# EAGLE board 555osc (EAGLE 7.3.0)
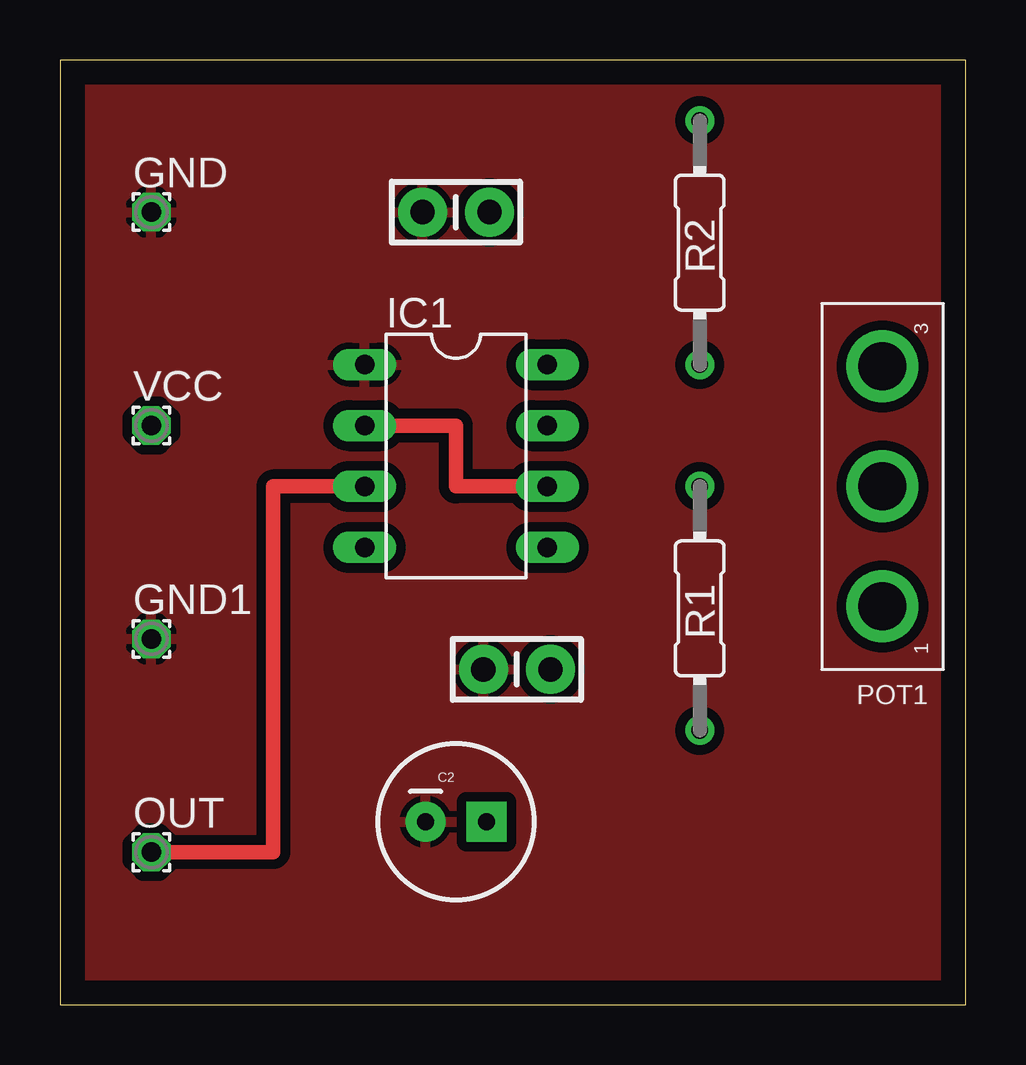
[diagram p0: board, top side]
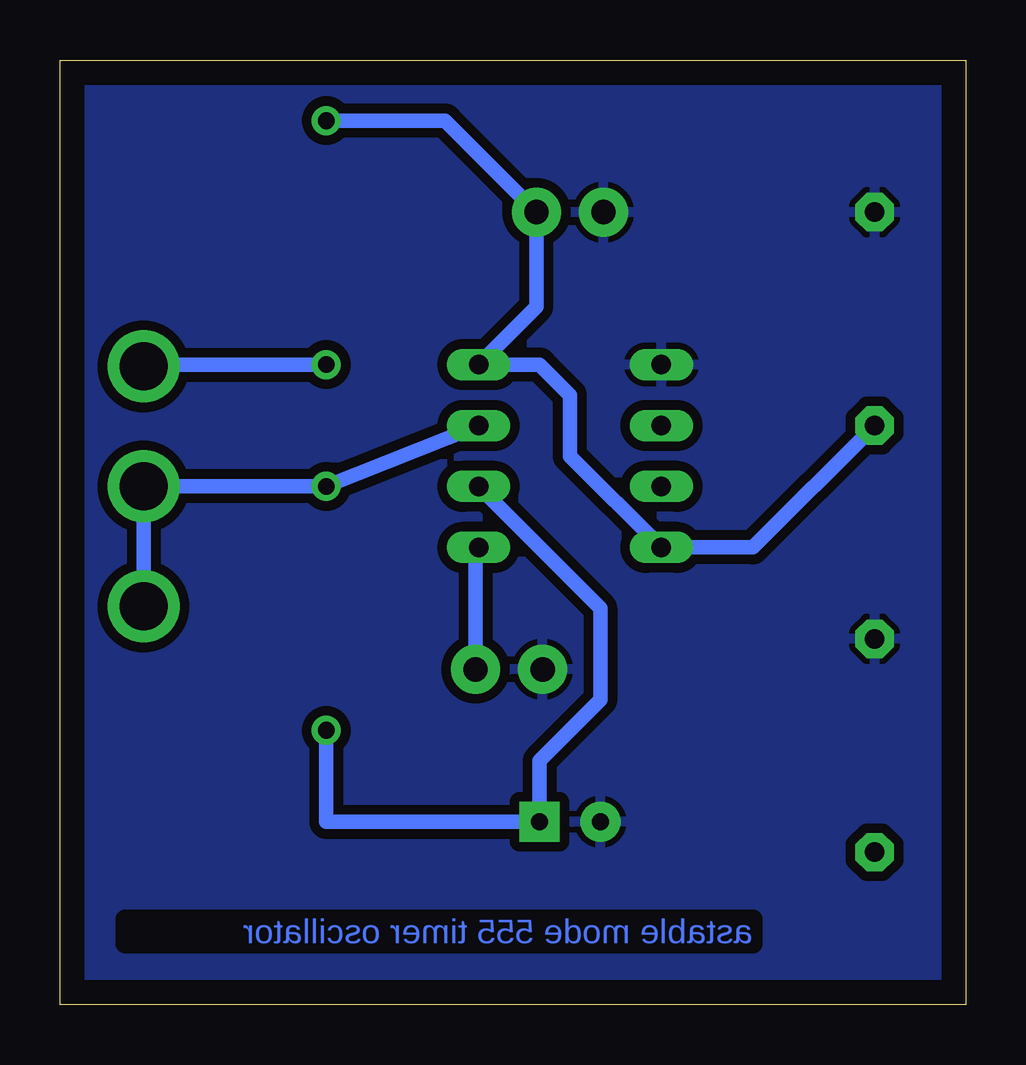
[diagram p1: board, bottom side, seen from below]

Size 37.77 x 39.36 mm. Coordinates in mm from the lower left corner, seen from the top.
Outline: 0,0 37.77,0 37.77,39.36 0,39.36 0,0
Copper layers (1*16): Top 0.035mm / dielectric 1.5mm / Bottom 0.035mm
Design rules "default": minimum track width 10mil, minimum drill 24mil, track to track 8mil, track to pad 8mil, pad to pad 8mil, via to via 8mil, smd to smd 8mil, copper to edge 40mil, drill to drill 8mil, minimum pad ring 10mil, minimum via ring 8mil, stop-mask expansion 4mil, vias tented up to drill 0mil, thermal gap 10mil

## Footprints (pad centres in the part's own frame; a part is rotated, then mirrored left to right if it is on the bottom)
CAP-PTH-SMALL-KIT = drill 1.016 pad 2.032: 1 -1.397,0; 2 1.397,0
CPOL-RADIAL-100UF-25V = drill 0.7 pad 1.651 square: 1 1.27,0 | drill 0.7 pad 1.651: 2 -1.27,0
1,6/0,8 = drill 0.813 pad 1.6 octagon: 1 0,0
DIL08 = drill 0.813 long: 1 -3.81,-3.81; 2 -1.27,-3.81; 3 1.27,-3.81; 4 3.81,-3.81; 5 3.81,3.81; 6 1.27,3.81; 7 -1.27,3.81; 8 -3.81,3.81
POT = drill 2: 1 -5,0; 2 0,0; 3 5,0
RESISTOR = drill 0.7: 1 -5.08,0; 2 5.08,0

## Placement (x,y rotation side)
C1  [CAP-PTH-SMALL-KIT]  19.05,13.97 180 top
C2  [CPOL-RADIAL-100UF-25V]  16.51,7.62 0 top
C3  [CAP-PTH-SMALL-KIT]  16.51,33.02 180 top
GND  [1,6/0,8]  3.81,33.02 0 top
GND1  [1,6/0,8]  3.81,15.24 0 top
IC1  ICM7555  [DIL08]  16.51,22.86 270 top
OUT  [1,6/0,8]  3.81,6.35 0 top
POT1  [POT]  34.29,21.59 90 top
R1  3MM.3  [RESISTOR]  26.67,16.51 90 top
R2  3MM.3  [RESISTOR]  26.67,31.75 90 top
VCC  [1,6/0,8]  3.81,24.13 0 top

## Library data of the parts
C1 C3 = SparkFun-Capacitors; PROD_ID: CAP-08370
C2 = SparkFun-Passives
GND GND1 OUT VCC = wirepad
IC1 = maxim; MF: MAXIM; MPN: ICM7555IPA+; OC_FARNELL: 9663762; OC_NEWARK: 68K4387
POT1 R1 R2 = 00_steve

## Nets
9V: C3.1 IC1.4 IC1.8 R2.2 VCC.1
GND: C1.2 C2.2 C3.2 GND1.1 GND.1 IC1.1
N$1: POT1.3 R2.1
N$2: C2.1 IC1.2 IC1.6 R1.1
N$3: C1.1 IC1.5
N$5: IC1.3 OUT.1
N$8: IC1.7 POT1.1 POT1.2 R1.2

## Tracks (layer width: path | path; a pad name or v marks a point on that pad's centre or on a via)
9V
  Bottom 0.61: VCC.1 8.89,19.05 IC1.4 16.51,22.86 16.51,25.4 17.78,26.67 IC1.8 17.91,29.08 C3.1 21.72,36.83 R2.2
GND
  pour Bottom (isolate 0.406): 0,39.37 0,0 38.1,0 38.1,39.37
  pour Top (isolate 0.406): 0,39.37 0,0 38.1,0 38.1,39.37
N$1
  Bottom 0.61: POT1.3 34.21,26.67 R2.1
N$2
  Top 0.61: IC1.6 16.51,21.59 16.51,24.13 IC1.2
  Bottom 0.61: IC1.6 15.24,16.51 15.24,12.7 17.78,10.16 C2.1 26.67,7.62 R1.1
N$3
  Bottom 0.61: IC1.5 20.45,18.92 C1.1
N$5
  Top 0.61: IC1.3 8.89,21.59 8.89,6.35 OUT.1
N$8
  Bottom 0.61: IC1.7 R1.2 POT1.2 POT1.1

## Text on the board
Bottom: astable mode 555 timer oscillator